# Altium PCB PCB1.PcbDoc
Units mil, origin at the board's own origin, x right, y up, seen from the top; angles counter-clockwise.
Board outline 3939 x 2849 mil, 2 copper layers (Top Layer, Bottom Layer); 123 components, 150 nets, 586 pads, 247 vias.
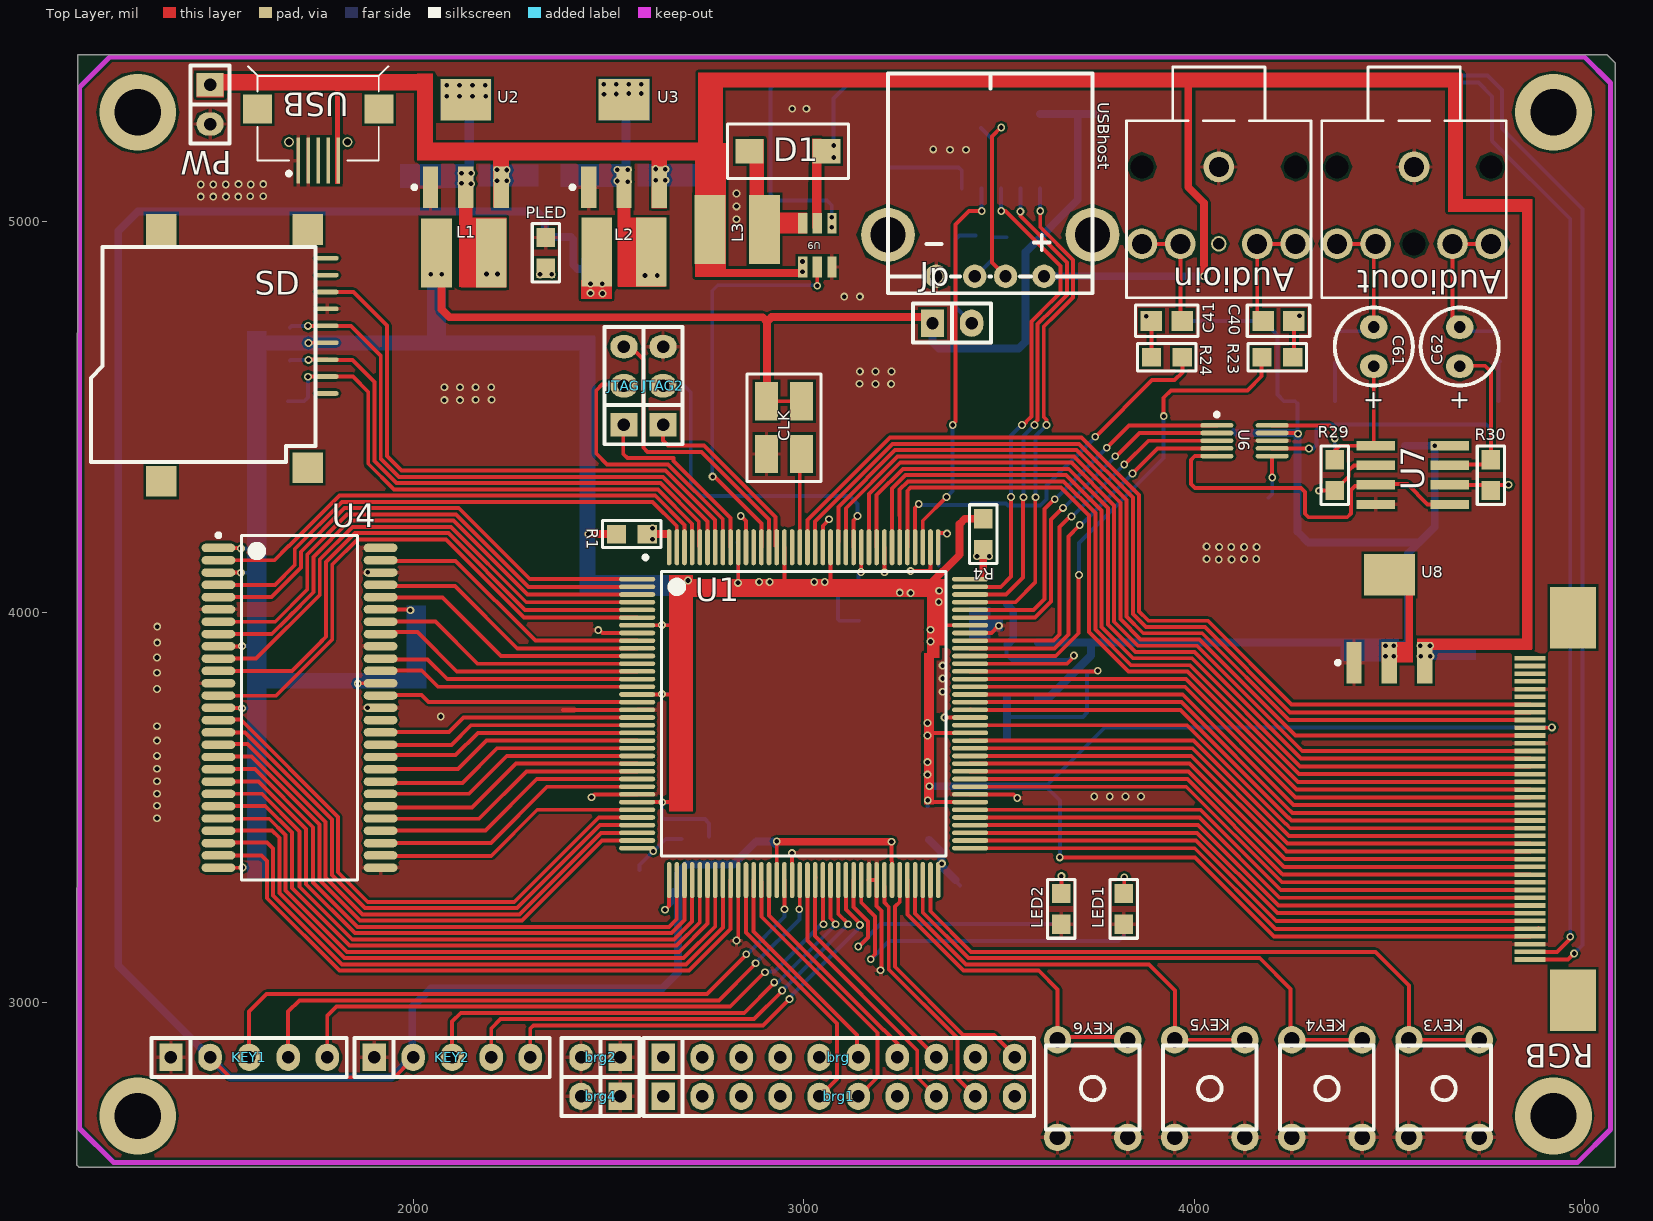
[diagram p0: Top Layer view]
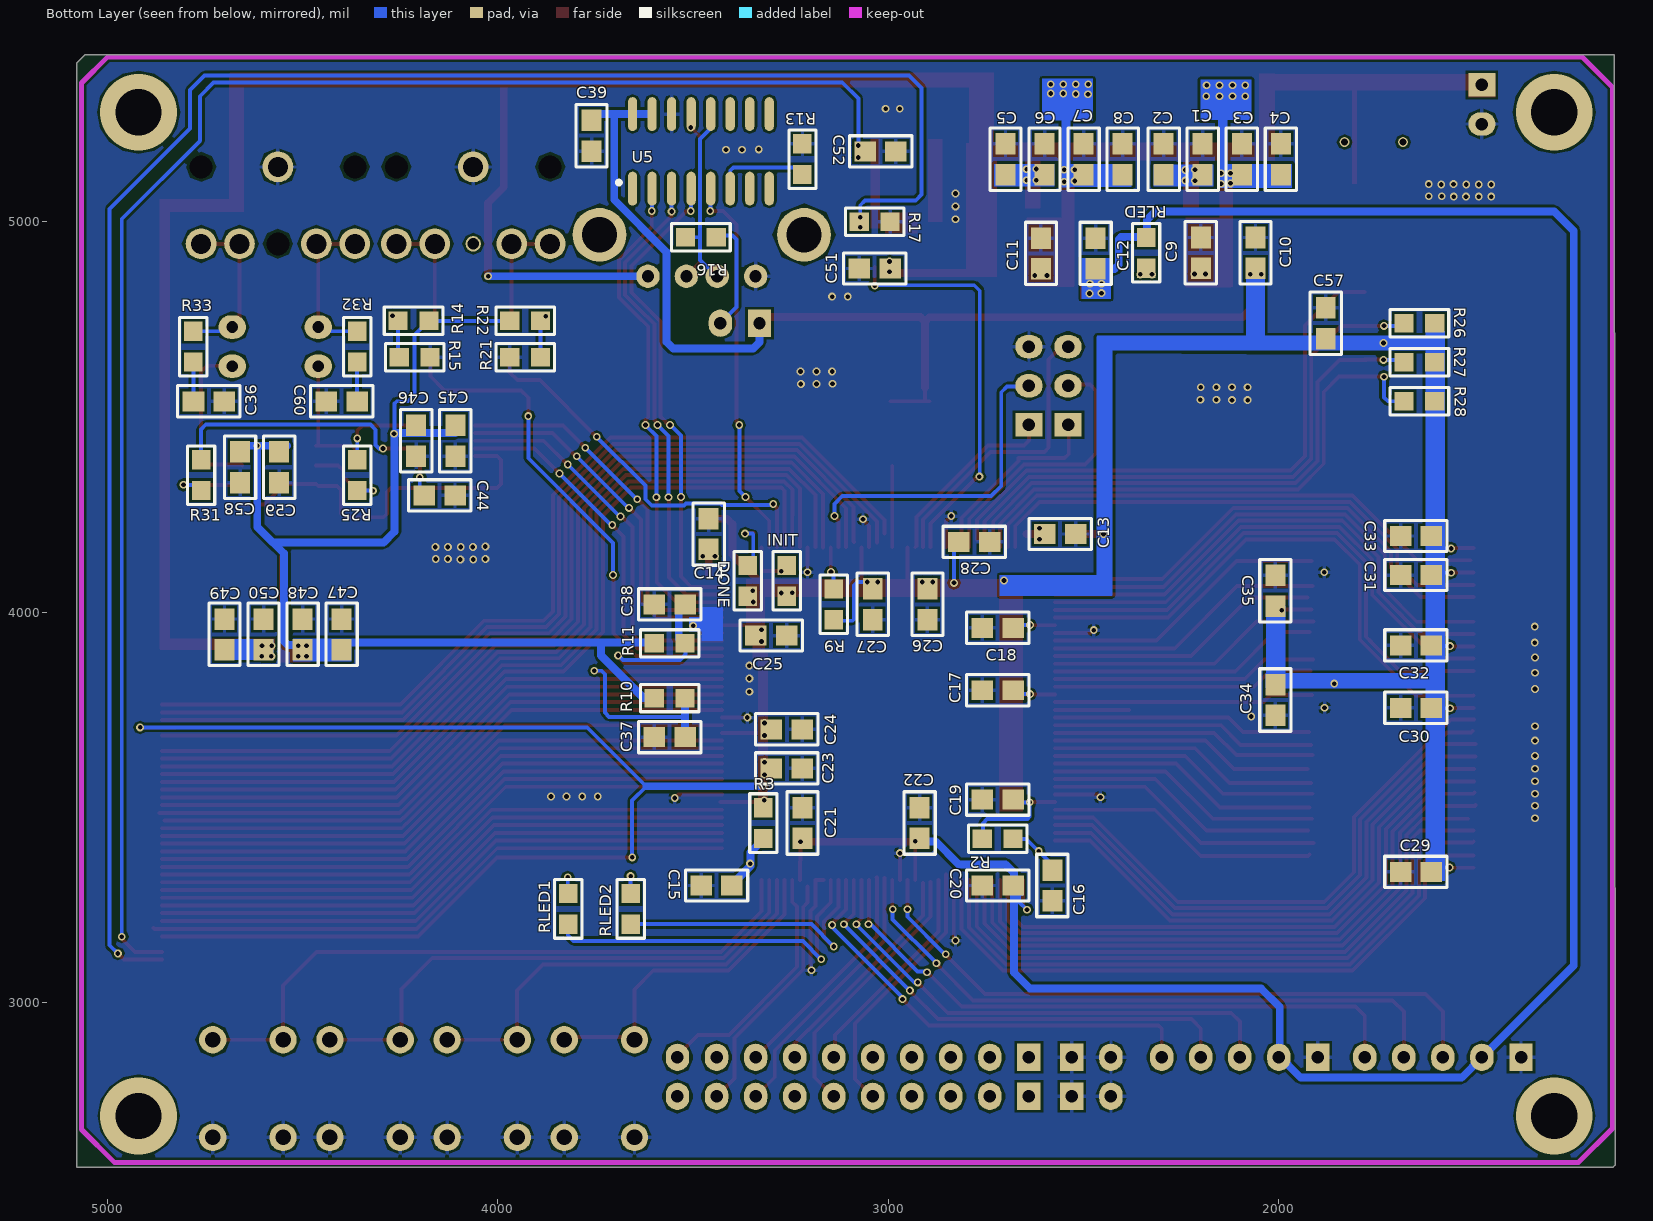
[diagram p1: Bottom Layer view, seen from below]

## Layer stack, top to bottom
Top Layer: signal copper 1.4
Dielectric: dielectric 12.6, FR-4, Dk 4.8
Bottom Layer: signal copper 1.4

## Board outline
1139,2584 1145,2578 5078,2578 5078,5407 5058,5427 1141,5427

## Design rules (kind name [scope] priority, off if disabled: settings)
Clearance [All] p1: gap=6
PolygonConnect [All] p1: connectstyle=Relief reliefconductorwidth=10 reliefentries=4 polygonreliefangle="90 Angle"
RoutingVias [All] p1: holewidth=28 width=50 viastyle="Through Hole" minholewidth=28 minwidth=50 maxholewidth=28 maxwidth=50
SilkscreenOverComponentPads [All] p1: minsilkscreentomaskgap=10
SolderMaskExpansion [All] p1: expansion=4
Width [All] p1: maxlimit=30 minlimit=10 preferedwidth=30
27 further rules are at their usual default settings.

## Components (designator, comment, footprint, x,y, rotation, side; value= is the part's Value field where it differs from the comment)
Audioin "Audio" AUDIO#1 4260,5140 r270 top
Audioout "Audio" AUDIO#2 4760,5140 r270 top
brg "CON10" sip10 2640,2860 r0 top
brg1 "CON10" sip10 2640,2760 r0 top
brg2 "CON2" SIP2 2480,2860 r180 top
brg4 "CON2" SIP2 2480,2760 r180 top
C1 "106" 电容器 2195,5160 r270 bottom
C2 "106" 电容器 2295,5160 r270 bottom
C3 "106" 电容器 2095,5160 r270 bottom
C4 "106" 电容器 1995,5160 r270 bottom
C5 "106" 电容器 2700,5160 r270 bottom
C6 "106" 电容器 2600,5160 r270 bottom
C7 "106" 电容器 2500,5160 r270 bottom
C8 "106" 电容器 2400,5160 r270 bottom
C9 "106" 电容器 2200,4920 r90 bottom
C10 "106" 电容器 2060,4920 r90 bottom
C11 "106" 电容器 2609.33,4918.5 r90 bottom
C12 "106" 电容器 2469.33,4918.5 r90 bottom
C13 "cpp" 电容器 2560,4200 r0 bottom
C14 "cpp" 电容器 3460,4200 r90 bottom
C15 "cpp" 电容器 3440,3300 r180 bottom
C16 "cpp" 电容器 2580,3300 r90 bottom
C17 "cpp" 电容器 2720,3800 r0 bottom
C18 "cpp" 电容器 2720,3960 r0 bottom
C19 "cpp" 电容器 2720,3520 r0 bottom
C20 "cpp" 电容器 2720,3300 r180 bottom
C21 "cpp" 电容器 3220,3460 r270 bottom
C22 "cpp" 电容器 2920,3460 r270 bottom
C23 "cpp" 电容器 3260,3600 r0 bottom
C24 "cpp" 电容器 3260,3700 r0 bottom
C25 "cpp" 电容器 3300,3940 r0 bottom
C26 "cpp" 电容器 2900,4020 r270 bottom
C27 "cpp" 电容器 3040,4020 r270 bottom
C28 "cpp" 电容器 2780,4180 r180 bottom
C29 "104" 电容器 1649,3335 r180 bottom
C30 "104" 电容器 1649,3755 r180 bottom
C31 "104" 电容器 1649,4095 r180 bottom
C32 "104" 电容器 1649,3915 r180 bottom
C33 "104" 电容器 1649,4195 r180 bottom
C34 "104" 电容器 2009,3775 r90 bottom
C35 "104" 电容器 2009,4055 r270 bottom
C36 "106" 电容器 4740,4540 r180 bottom
C37 "104" 电容器 3560,3680 r180 bottom
C38 "104" 电容器 3560,4020 r0 bottom
C39 "104" 电容器 3760,5220 r90 bottom
C40 "106" 电容器 4216,4746 r180 top
C41 "106" 电容器 3930,4746 r0 top
C44 "106" 电容器 4149,4299 r0 bottom
C45 "104" 电容器 4109,4439 r90 bottom
C46 "106" 电容器 4209,4439 r90 bottom
C47 "3.3uf" 电容器 4400,3943 r270 bottom
C48 "cpp" 电容器 4500,3943 r90 bottom
C49 "cpp" 电容器 4700,3943 r90 bottom
C50 "3.3uf" 电容器 4600,3943 r270 bottom
C51 "cpp" 电容器 3035,4880 r180 bottom
C52 "cpp" 电容器 3020,5180 r180 bottom
C57 "104" 电容器 1880,4740 r270 bottom
C58 "0.1uf" 电容器 4660,4371 r90 bottom
C59 "106" 电容器 4560,4371 r90 bottom
C60 "0.1uf" 电容器 4400,4540 r180 bottom
C61 "100uf" RB.1/.2 4460,4680 r270 top
C62 "Cap Pol" RB.1/.2 4680,4680 r270 top
CLK "SM77H" SM77H 3260,4480 r0 top
D1 "SS54" "SS54 - duplicate" 2960,5180 r180 top
DONE "" R_0805 3360,4080 r90 bottom
INIT "" R_0805 3260,4080 r270 bottom
Jp "CON2" SIP2 3380,4740 r0 top
JTAG "CON3" SIP3 2540,4580 r90 top
JTAG2 "CON3" SIP3 2640,4580 r90 top
KEY1 "CON5" SIP5 1380,2860 r0 top
KEY2 "CON5" SIP5 1900,2860 r0 top
KEY3 "KEY" AN66 4640,2780 r180 top
KEY4 "KEY" AN66 4340,2780 r180 top
KEY5 "KEY" AN66 4040,2780 r180 top
KEY6 "KEY" AN66 3740,2780 r180 top
L1 "4.8u" L 2200,4920 r90 top
L2 "4.8u" L 2610,4922 r90 top
L3 "L" L 2900,4980 r90 top
LED1 "R_0805" R_0805 3820,3240 r90 top
LED2 "R_0805" R_0805 3660,3240 r90 top
PLED "5K" R_0805 2340,4920 r90 top
PW "CON2" SIP2 1480,5300 r270 top
R1 "R_0805" R_0805 2560,4200 r180 top
R2 "R_0805" R_0805 2720,3420 r180 bottom
R3 "R_0805" R_0805 3320,3460 r270 bottom
R4 "R_0805" R_0805 3460,4200 r90 top
R9 "10K" R_0805 3140,4020 r270 bottom
R10 "10K" R_0805 3560,3780 r0 bottom
R11 "10K" R_0805 3560,3920 r180 bottom
R13 "10K" R_0805 3220,5160 r270 bottom
R14 "10K" R_0805 4216,4746 r180 bottom
R15 "10K" R_0805 4213,4653 r0 bottom
R16 "10K" R_0805 3480,4960 r0 bottom
R17 "10K" R_0805 3035,5000 r0 bottom
R21 "10K" R_0805 3930,4653 r180 bottom
R22 "10K" R_0805 3930,4746 r0 bottom
R23 "R_0805" R_0805 4213,4653 r0 top
R24 "R_0805" R_0805 3930,4653 r180 top
R25 "R_0805" R_0805 4360,4351 r270 bottom
R26 "10k" R_0805 1640,4740 r180 bottom
R27 "10k" R_0805 1640,4640 r180 bottom
R28 "10k" R_0805 1640,4540 r180 bottom
R29 "R_0805" R_0805 4360,4351 r90 top
R30 "R_0805" R_0805 4760,4351 r90 top
R31 "R_0805" R_0805 4760,4351 r270 bottom
R32 "R_0805" R_0805 4360,4680 r90 bottom
R33 "R_0805" R_0805 4780,4680 r270 bottom
RGB "PFC_40PIN" FPC_40PIN 4860,3500 r180 top
RLED "5K" R_0805 2340,4920 r90 bottom
RLED1 "R_0805" R_0805 3820,3240 r270 bottom
RLED2 "R_0805" R_0805 3660,3240 r270 bottom
SD "SD" TF卡座 1780,4560 r270 top
U1 "EF2" LQFP_EF2 3000,3740 r0 top
U2 "1117_3.3" SOT230P700X180-4N 2135,5200 r90 top
U3 "1117_2.5" SOT230P700X180-4N 2540,5200 r90 top
U4 "SDRAM" SDRAM 1709,3755 r0 top
U5 "WCH554" WCH554G 3480,5180 r90 bottom
U6 "CS4344" "SSOP10 _CS4344" 4129,4439 r0 top
U7 "TDA1308" TDA1308 4560,4351 r0 top
U8 "1117_3.3" SOT230P700X180-4N 4500,3983 r90 top
U9 "SY7200" SOT23-6N 3035,4940 r90 top
USB "USB" micro-USB 1740,5280 r90 top
USBhost "USBhost" USB-H 3340,4860 r180 top

## Footprints (in the part's own frame and the unit in brackets; to place one, negate y for a bottom-side part, rotate by r counter-clockwise, add the part's x,y. Pads: shape width x height; smd on the part's side, far side on the other; paste and mask are expansions set on the pad)
AN66 [mil]
  round 70 hole 40: 1(-90,125) 1(90,125) 2(-90,-125) 2(90,-125)
  silkscreen extent -120,-110 120,105
AUDIO#1 [mm]
  round 1 hole 0.762: 0(5,-5)
  round 1 hole 1.5: 1(0,0) 2(0,-10)
  round 2 hole 1.3: 1S(0,-5) 2R(5,-10) 3N(5,-7.5) 4N(5,-2.5) 5T(5,0)
  silkscreen extent -6.5,-11 8.5,1, body extent -6.23,-11.05 8.77,1.15, height 11
AUDIO#2 [mm]
  round 1 hole 1.5: 0(5,-5) 1(0,0) 2(0,-10)
  round 2 hole 1.3: 1S(0,-5) 2R(5,-10) 3N(5,-7.5) 4N(5,-2.5) 5T(5,0)
  silkscreen extent -6.5,-11 8.5,1, body extent -6.23,-11.05 8.77,1.15, height 11
FPC_40PIN [mm]
  rect 3x4 smd: 0(-2.8,-12.35) 0(-2.8,12.55)
  rect 2x0.3 smd: 1(0,-9.702) 2(0,-9.199) 3(0,-8.697) 4(0,-8.194) 5(0,-7.692) 6(0,-7.189) 7(0,-6.687) 8(0,-6.185) 9(0,-5.683) 10(0,-5.18) 11(0,-4.677) 12(0,-4.175) 13(0,-3.672) 14(0,-3.169) 15(0,-2.666) 16(0,-2.164) 17(0,-1.661) 18(0,-1.158) 19(0,-0.655) 20(0,-0.153) 21(0,0.349) 22(0,0.852) 23(0,1.354) 24(0,1.855) 25(0,2.357) 26(0,2.86) 27(0,3.363) 28(0,3.866) 29(0,4.369) 30(0,4.871) 31(0,5.374) 32(0,5.877) 33(0,6.38) 34(0,6.881) 35(0,7.384) 36(0,7.887) 37(0,8.387) 38(0,8.89) 39(0,9.392) 40(0,9.895)
L [mm]
  rect 4.5x2 smd: 1(0,3.556) 2(0,0)
LQFP_EF2 [mm]
  oval 2.35x0.3 smd: 1(-10.825,8.75) 2(-10.825,8.25) 3(-10.825,7.75) 4(-10.825,7.25) 5(-10.825,6.75) 6(-10.825,6.25) 7(-10.825,5.75) 8(-10.825,5.25) 9(-10.825,4.75) 10(-10.825,4.25) 11(-10.825,3.75) 12(-10.825,3.25) 13(-10.825,2.75) 14(-10.825,2.25) 15(-10.825,1.75) 16(-10.825,1.25) 17(-10.825,0.75) 18(-10.825,0.25) 19(-10.825,-0.25) 20(-10.825,-0.75) 21(-10.825,-1.25) 22(-10.825,-1.75) 23(-10.825,-2.25) 24(-10.825,-2.75) 25(-10.825,-3.25) 26(-10.825,-3.75) 27(-10.825,-4.25) 28(-10.825,-4.75) 29(-10.825,-5.25) 30(-10.825,-5.75) 31(-10.825,-6.25) 32(-10.825,-6.75) 33(-10.825,-7.25) 34(-10.825,-7.75) 35(-10.825,-8.25) 36(-10.825,-8.75) 73(10.825,-8.75) 74(10.825,-8.25) 75(10.825,-7.75) 76(10.825,-7.25) 77(10.825,-6.75) 78(10.825,-6.25) 79(10.825,-5.75) 80(10.825,-5.25) 81(10.825,-4.75) 82(10.825,-4.25) 83(10.825,-3.75) 84(10.825,-3.25) 85(10.825,-2.75) 86(10.825,-2.25) 87(10.825,-1.75) 88(10.825,-1.25) 89(10.825,-0.75) 90(10.825,-0.25) 91(10.825,0.25) 92(10.825,0.75) 93(10.825,1.25) 94(10.825,1.75) 95(10.825,2.25) 96(10.825,2.75) 97(10.825,3.25) 98(10.825,3.75) 99(10.825,4.25) 100(10.825,4.75) 101(10.825,5.25) 102(10.825,5.75) 103(10.825,6.25) 104(10.825,6.75) 105(10.825,7.25) 106(10.825,7.75) 107(10.825,8.25) 108(10.825,8.75)
  oval 0.3x2.35 smd: 37(-8.75,-10.825) 38(-8.25,-10.825) 39(-7.75,-10.825) 40(-7.25,-10.825) 41(-6.75,-10.825) 42(-6.25,-10.825) 43(-5.75,-10.825) 44(-5.25,-10.825) 45(-4.75,-10.825) 46(-4.25,-10.825) 47(-3.75,-10.825) 48(-3.25,-10.825) 49(-2.75,-10.825) 50(-2.25,-10.825) 51(-1.75,-10.825) 52(-1.25,-10.825) 53(-0.75,-10.825) 54(-0.25,-10.825) 55(0.25,-10.825) 56(0.75,-10.825) 57(1.25,-10.825) 58(1.75,-10.825) 59(2.25,-10.825) 60(2.75,-10.825) 61(3.25,-10.825) 62(3.75,-10.825) 63(4.25,-10.825) 64(4.75,-10.825) 65(5.25,-10.825) 66(5.75,-10.825) 67(6.25,-10.825) 68(6.75,-10.825) 69(7.25,-10.825) 70(7.75,-10.825) 71(8.25,-10.825) 72(8.75,-10.825) 109(8.75,10.825) 110(8.25,10.825) 111(7.75,10.825) 112(7.25,10.825) 113(6.75,10.825) 114(6.25,10.825) 115(5.75,10.825) 116(5.25,10.825) 117(4.75,10.825) 118(4.25,10.825) 119(3.75,10.825) 120(3.25,10.825) 121(2.75,10.825) 122(2.25,10.825) 123(1.75,10.825) 124(1.25,10.825) 125(0.75,10.825) 126(0.25,10.825) 127(-0.25,10.825) 128(-0.75,10.825) 129(-1.25,10.825) 130(-1.75,10.825) 131(-2.25,10.825) 132(-2.75,10.825) 133(-3.25,10.825) 134(-3.75,10.825) 135(-4.25,10.825) 136(-4.75,10.825) 137(-5.25,10.825) 138(-5.75,10.825) 139(-6.25,10.825) 140(-6.75,10.825) 141(-7.25,10.825) 142(-7.75,10.825) 143(-8.25,10.825) 144(-8.75,10.825)
  silkscreen extent -10.41,-9.25 9.25,10.28, body extent -10.25,-10.25 10.25,10.25, height 1.6
micro-USB [mm]
  rect 3x0.25 smd: 1(-3.146,-1.732) 2(-3.146,-1.082) 3(-3.146,-0.432) 4(-3.146,0.218) 5(-3.146,0.868)
  round 0.635 hole 0.457 unplated: MH1(-1.938,1.468) MH2(-1.938,-2.332)
  rect 1.9x1.9 smd: ""(0.212,3.518) ""(0.212,-4.382)
  silkscreen extent -4.11,-5 2.99,4.14, body extent -2.67,-4.83 2.93,3.97, height 2.74
R_0805 [mm]
  rect 1.25x1.2 smd: 1(-1,0) 2(1,0)
  silkscreen extent -1.91,-0.89 1.91,0.89
RB.1/.2 [mil]
  oval 60x70 hole 30: 1(50,0) 2(-50,0)
  silkscreen extent -100,-100 100,100
SDRAM [mm]
  oval 2.2x0.55 smd: 1(-5.275,10.4) 2(-5.275,9.6) 3(-5.275,8.8) 4(-5.275,8) 5(-5.275,7.2) 6(-5.275,6.4) 7(-5.275,5.6) 8(-5.275,4.8) 9(-5.275,4) 10(-5.275,3.2) 11(-5.275,2.4) 12(-5.275,1.6) 13(-5.275,0.8) 14(-5.275,0) 15(-5.275,-0.8) 16(-5.275,-1.6) 17(-5.275,-2.4) 18(-5.275,-3.2) 19(-5.275,-4) 20(-5.275,-4.8) 21(-5.275,-5.6) 22(-5.275,-6.4) 23(-5.275,-7.2) 24(-5.275,-8) 25(-5.275,-8.8) 26(-5.275,-9.6) 27(-5.275,-10.4) 28(5.275,-10.4) 29(5.275,-9.6) 30(5.275,-8.8) 31(5.275,-8) 32(5.275,-7.2) 33(5.275,-6.4) 34(5.275,-5.6) 35(5.275,-4.8) 36(5.275,-4) 37(5.275,-3.2) 38(5.275,-2.4) 39(5.275,-1.6) 40(5.275,-0.8) 41(5.275,0) 42(5.275,0.8) 43(5.275,1.6) 44(5.275,2.4) 45(5.275,3.2) 46(5.275,4) 47(5.275,4.8) 48(5.275,5.6) 49(5.275,6.4) 50(5.275,7.2) 51(5.275,8) 52(5.275,8.8) 53(5.275,9.6) 54(5.275,10.4)
  silkscreen extent -5.4,-11.2 3.77,11.35, body extent -5.15,-11.18 5.14,11.17, height 1.75
SIP2 [mil]
  rect 60x70 hole 32: 1(-50,0)
  oval 60x70 hole 32: 2(50,0)
  silkscreen extent -100,-50 100,50
SIP3 [mil]
  rect 60x70 hole 32: 1(-100,0)
  oval 60x70 hole 32: 2(0,0) 3(100,0)
  silkscreen extent -150,-50 150,50
SIP5 [mil]
  rect 60x70 hole 32: 1(0,0)
  oval 60x70 hole 32: 2(100,0) 3(200,0) 4(300,0) 5(400,0)
  silkscreen extent -50,-50 450,50
sip10 [mil]
  rect 60x70 hole 32: 1(0,0)
  oval 60x70 hole 32: 2(100,0) 3(200,0) 4(300,0) 5(400,0) 6(500,0) 7(600,0) 8(700,0) 9(800,0) 10(900,0)
  silkscreen extent -50,-50 950,50
SM77H [mm]
  rect 1.5x2.5 smd: 1(-9.017,1.524) 2(-9.017,-1.905) 3(-6.731,-1.905) 4(-6.731,1.524)
  silkscreen extent -10.29,-3.68 -5.46,3.3
SOT23-6N [mm]
  rect 1.35x0.6 smd: 1(-1.425,0.95) 2(-1.425,0) 3(-1.425,-0.95) 4(1.425,-0.95) 5(1.425,0) 6(1.425,0.95)
  body extent -0.51,-1.4 0.51,1.4, height 1.1
SOT230P700X180-4N [mm] "SOT223, 4-Leads, Body 6.7x7.3mm (max), Pitch 2.30mm, IPC Medium Density"
  rect 2.7x1 smd: 1(-2.85,2.3) 2(-2.85,0) 3(-2.85,-2.3)
  rect 2.7x3.3 smd: 2(2.85,0)
  silkscreen extent -2.97,3.22 -2.73,3.47, body extent -1.85,-3.35 1.85,3.35, height 1.8
"SS54 - duplicate" [mm]
  rect 1.8x1.6 smd: 1(-2.5,0) 2(2.5,0)
  silkscreen extent -3.94,-1.78 3.94,1.78
"SSOP10 _CS4344" [mm]
  oval 2.15x0.3 smd: 1(-1.8,1) 2(-1.8,0.5) 3(-1.8,0) 4(-1.8,-0.5) 5(-1.8,-1) 6(1.8,-1) 7(1.8,-0.5) 8(1.8,0) 9(1.8,0.5) 10(1.8,1)
  silkscreen extent -1.92,1.58 -1.67,1.82, body extent -1.5,-1.5 1.5,1.5, height 1.75
TDA1308 [mm] "SOIC, 8-Leads, Body 5.0x4.0mm (max), Pitch 1.27mm, IPC Medium Density"
  rect 2.5x0.6 smd: 1(-2.4,1.905) 2(-2.4,0.635) 3(-2.4,-0.635) 4(-2.4,-1.905) 5(2.4,-1.905) 6(2.4,-0.635) 7(2.4,0.635) 8(2.4,1.905)
  body extent -2,-2.5 2,2.5, height 1.75
TF卡座 [mm]
  rect 2x2 smd: 0(-10.668,-1.27) 0(-10.668,-10.795) 0(4.826,-1.27) 0(5.715,-10.795)
  oval 0.3x1.5 smd: 1(0,0) 2(-1.1,0) 3(-2.2,0) 4(-3.3,0) 5(-4.4,0) 6(-5.5,0) 7(-6.6,0) 8(-7.7,0) 9(-8.8,0)
  silkscreen extent -9.52,-15.37 4.45,-0.76, body extent -10.79,-15.24 5.72,0.13, height 2
USB-H [mm]
  round 1.524 hole 0.8: 1(0,0) 2(-2.5,0) 3(-4.5,0) 4(-7,0)
  round 3.5 hole 2.3: 5(-10.15,-2.7) 5(3.15,-2.7)
  silkscreen extent -10.15,-13.2 3.15,1.1, body extent -11.4,-13.06 4.4,1.1, height 7.55
WCH554G [mm]
  oval 2.2x0.6 smd: 1(-2.425,4.445) 2(-2.425,3.175) 3(-2.425,1.905) 4(-2.425,0.635) 5(-2.425,-0.635) 6(-2.425,-1.905) 7(-2.425,-3.175) 8(-2.425,-4.445) 9(2.425,-4.445) 10(2.425,-3.175) 11(2.425,-1.905) 12(2.425,-0.635) 13(2.425,0.635) 14(2.425,1.905) 15(2.425,3.175) 16(2.425,4.445)
  silkscreen extent -2.15,5.21 -1.91,5.46
电容器 [mm]
  rect 1.4x1.3 smd: 1(-1,0) 2(1,0)
  silkscreen extent -2.03,-1.02 2.03,1.02

## Part data
C1 C2 C3 C4 C5 C6 C7 C8 C9 C10 C11 C12 C29 C30 C31 C32 C33 C34 C35 C36 C37 C38 C39 C40 C41 C44 C45 C46 C47 C50 C57 C58 C59 C60: library part cpp
C61: library part "Cap Pol"
DONE INIT PLED R9 R10 R11 R13 R14 R15 R16 R17 R21 R22 R26 R27 R28 RLED: library part R_0805
L1 L2: library part L
SD: library part TF卡座
U2 U3 U8: library part 1117

## Via types
v1: diameter 20, hole 12, Top Layer to Bottom Layer, 243 vias
v2: diameter 196.85, hole 118.11, Top Layer to Bottom Layer, 4 vias

## Nets (pads, with @x,y where several pads share a name; then routed paths per layer and width w, separated by ;. In a path a pad name is that pad's centre, name@x,y a point inside that pad or via, vN(x,y) a via of type N, cw(c..) or ccw(c..) an arc to the next point about the centre after c; other vN are vias at no path point)
2.5V: C12.1 C20.2 C21.2 C22.2 KEY1.2 KEY2.2 L2.1 RLED.2 U1.37 U1.51 U1.66 | length 6755.7
  Top Layer w10: KEY1.2 1531,2809 1952,2809 KEY2.2@1995,2852 ; v1@2646,3238 2655.51,3247.51 U1.37 ; U1.51 v1@2931.1,3406 ; U1.66 3225.38,3412 v1@3226.38,3408
  Top Layer w20: v1@2932,3412 v1@3225.38,3412
  Bottom Layer w10: C12.1@2465,4879.13 C12.1 ; v1(2645,3238) 2665,3258 C20.2@2665,3284.37 ; C20.2@2659,3278.37 C20.2@2665,3284.37 ; C20.2@2665,3288 C20.2@2665,3284.37 ; C20.2 C20.2@2665,3284.37 ; C22.2@2929,3405 C22.2@2932,3409
  Bottom Layer w20: KEY1.2@1478,2862 KEY1.2 ; C12.1@2465,4879 2421,4879 2410,4890 2410,4955 2404,4961 2338,4961 2338,5004 2316,5026 1295,5026 1245,4976 1245,3095 KEY1.2 ; C22.2@2929,3405 2921,3413 2879,3413 2820,3354 2700,3354 2678,3332 2678,3077 2637,3036 2045,3036 1998,2989 1998,2878 2006,2870 1944,2808 1532,2808 KEY1.2
  other v1: 3225,3412 2931,3413 2485,4816 2454,4817 2454,4841 2484,4841
2.5VOUT: C7.2 C8.2 C11.1 L2.2 U3.2
  other v1: 2594,4862 2625,4862 2550,5102 2523,5104 2523,5133 2550,5133 2489,5326 2520,5327 2552,5328 2584,5328 2488,5352 2520,5352 2552,5352 2584,5352
3.3V: C10.1 C17.1 C18.1 C19.1 C23.2 C24.2 C25.2 C26.1 C27.1 C28.1 C29.2 C30.2 C31.2 C32.2 C33.2 C34.2 C35.2 C39.2 C57.2 CLK.1 CLK.4 DONE.1 INIT.2 Jp.1 L1.1 R1.2 R2.1 R3.1 R4.2 R9.2 R26.2 R27.2 R28.2 RGB.10 RGB.37 SD.4 U1.7 U1.16 U1.30 U1.79 U1.88 U1.102 U1.123 U1.129 U1.135 U4.1 U4.3 U4.9 U4.14 U4.27 U4.43 U4.49 U5.15 U5.16 | length 8567.3
  Top Layer w10: U4.27 v1@1561.55,3345.55 ; U4.14 v1@1561,3755 ; U4.9 v1@1561.48,3912.48 ; U4.3 v1@1558.54,4101.46 ; U4.1 v1@1557.55,4164.45 ; v1@1734.92,4689.92 SD.4 ; v1@1860.99,3817.99 U4.43 ; U4.49 1994.03,4006.97 v1@1995,4006 ; v1@2448,4199 v1(2449,4200) ; U1.30 2685.38,3513.62 ; U1.16 2678.79,3789.21 ; U1.7 2680.38,3966.38 ; v1@2832.68,4074 U1.135 ; CLK.1@2895,4540 CLK.1 CLK.4 ; CLK.1@2906,4545 CLK.1@2906,4575 ; 2906,4742 2907,4743 ; 2950,4076 2950.79,4076.79 U1.129 ; U1.123 3068.9,4080.1 3070,4079 ; Jp.1@3312,4758 Jp.1 ; v1@3314,3514 U1.79@3430,3514 ; v1@3316,3692 3317.21,3690.79 U1.88 ; 3346.62,3966.38 U1.102 ; R4.2@3460,4227 R4.2 ; v1@3654.02,3372 v1(3656,3372) 4002.37,3372 4204.57,3169.8 RGB.37 ; RGB.10@4826,3703.94 RGB.10 v1@4918,3703.94
  Top Layer w20: v1(2073,4865) 2073,4775 2093,4755 2895,4755 2906,4744 ; v1(2449,4200) R1.2 ; CLK.1@2906,4575 2906,4742 2906,4744 ; 3318,4066 3399.37,4147.37 3399.37,4225.37 3413,4239 R4.2@3463,4239 ; Jp.1@3322,4758 3312,4758 3310,4756 2918,4756 2906,4744
  Bottom Layer w10: v1(1559,4101) C31.2@1599,4101 ; v1(1559,4163) 1600,4163 ; v1(1562,3754) 1600,3754 C30.2@1602,3752 ; v1(1562,3913) C32.2@1601,3913 ; v1(1563,3346) 1607,3346 C29.2@1608,3347 ; C31.2@1603.63,4101 C31.2 ; v1(2637,3790) C17.1@2680.63,3790 ; v1(2637,3967) C18.1@2678,3967 ; C19.1@2678,3513 v1(2638,3513) 2638,3476 2644,3470 2747,3470 2758,3459 R2.1@2758,3425 ; C28.1@2831,4178 2832,4177 v1(2832,4075) ; v1(3054,4077) 3079,4077 3088,4068 3088,3982 3092,3978 R9.2@3142,3978 ; R3.1@3317,3504 R3.1@3318,3503 ; v1@3656,3373 3656,3518 3620,3554 3771,3705 v1(4916,3705)
  Bottom Layer w20: v1(3322,3554) 3620,3554 ; Jp.1 3330,4691 3346,4675 3551,4675 3568,4692 3568,4922 3702,5056 3702,5273 ; U5.15 U5.16 3770.53,5275.47 C39.2@3774,5272
  other v1: 3318,3518 3317,3584 3317,3616 3317,3684 3317,3716 1858,3817 3325,3925 3325,3955 1993,4005 3346,4026 3274,4049 3246,4050 3347,4055 2886,4077 2913,4077 3027,4077 2704,4081 1732,4689 2045,4865
3.3VA: C45.2 C46.2 C47.2 C48.1 C58.2 C59.2 R10.2 R11.1 R14.2 R22.2 U6.9 U7.8 U8.2 | length 3063.4
  Top Layer w10: U6.9 v1@4263,4459
  Bottom Layer w10: R22.2 R14.2 4177,4746 4213,4710 4213,4557 4230,4540 4259,4540 4265,4534 4265,4460 4270,4455 v1@4268,4453 ; C45.2@4101,4467 C45.2@4109,4459 ; v1@4265,4453 v1@4267,4455
  Bottom Layer w20: R10.2@3599.37,3777.63 R10.2@3600,3777 ; R10.2 3627,3780 3736,3889 3736,3918 ; R11.1@3599.37,3922 4234,3922 4285,3922 4390.63,3922 C47.2@4399.63,3913 ; C45.2@4109,4459 v1@4264,4459 ; v1@4265,4453 4265,4206 4293,4178 4575,4178 ; C48.1@4510,3916 4538,3916 4548,3926 4548,4151 4575,4178 ; C59.2@4540,4426 v1(4616,4426) ; C58.2@4659,4426 v1(4616,4426) ; 4575,4178 4576,4178 4616,4218 v1(4616,4426)
  other v1: 4490,3887 4511,3887 4490,3914 4511,3914 4266,4457
3.3VOUT: C3.2 C4.2 C9.1 L1.2 U2.2
  other v1: 2188,4866 2216,4866 2148,5097 2124,5098 2124,5124 2148,5124 2086,5321 2119,5321 2152,5321 2186,5321 2086,5349 2119,5349 2152,5349 2185,5349
5V: C1.2 C2.2 C5.2 C6.2 C49.1 C50.2 C51.2 L3.1 PW.1 U2.3 U3.3 U8.3 U9.1 USB.1 USBhost.4 | length 928
  Top Layer w20: 3985,5362 3985,5088 4025,5048 v1(4025,4860)
  Bottom Layer w20: USBhost.4 v1(4025,4860)
  other v1: 4580,3887 4605,3887 4579,3914 4604,3914 2997,4872 2997,4898 2215,5105 2240,5105 2621,5106 2646,5106 2240,5132 2215,5133 2646,5134 2621,5135
A0: U1.42 U4.23 | length 1602
  Top Layer w10: U4.23@1516,3471 1631.63,3471 1673.69,3428.94 1673.69,3287.2 1830.88,3130 2681.51,3130 2754,3202.49 U1.42@2754,3312.14
A1: U1.43 U4.24 | length 1643.3
  Top Layer w10: U4.24@1501,3441 1639,3441 1657.69,3422.31 1657.69,3280.57 1824.25,3114 2692.37,3114 2773.62,3195.25 U1.43
A2: U1.44 U4.25 | length 1653.9
  Top Layer w10: U4.25@1501,3413 1504,3410 1626,3410 1641.69,3394.31 1641.69,3273.94 1817.63,3098 2699,3098 2793.31,3192.31 U1.44
A3: U1.45 U4.26 | length 1658.9
  Top Layer w10: U4.26 1611.28,3377.05 1625.69,3362.64 1625.69,3267.31 1811,3082 2706,3082 2812.99,3188.99 U1.45
A4: U1.31 U4.29 | length 701.9
  Top Layer w10: U4.29@1922,3379 1925,3376 2200,3376 2317.94,3493.94 U1.31
A5: U1.28 U4.30 | length 722.5
  Top Layer w10: U4.30@1911,3409 2199,3409 2342.99,3552.99 U1.28
A6: U1.27 U4.31 | length 703.4
  Top Layer w10: U4.31@1925,3441 2185,3441 2316.68,3572.68 U1.27
A7: U1.26 U4.32 | length 709.1
  Top Layer w10: U4.32@1915,3471 2169,3471 2290.36,3592.36 U1.26
A8: U1.25 U4.33 | length 698.2
  Top Layer w10: U4.33@1922,3500 2151,3500 2263.05,3612.05 U1.25
A9: U1.24 U4.34 | length 699.9
  Top Layer w10: U4.34@1914,3535 2143,3535 2239.73,3631.73 U1.24
A10: U1.41 U4.22 | length 1603.4
  Top Layer w10: U4.22@1496,3506 1498,3504 1621.25,3504 1689.69,3435.57 1689.69,3293.82 1837.51,3146 2674.88,3146 2734,3205.12 2734,3313.57 U1.41
A11: U1.23 U4.35 | length 692.4
  Top Layer w10: U4.35@1918,3563 2126,3563 2214.42,3651.42 U1.23
A12: U1.22 U4.36 | length 678.1
  Top Layer w10: U4.36@1926,3598 2115,3598 2188.1,3671.1 U1.22
ADC_L: R24.1 U1.112 | length 999.4
  Top Layer w10: U1.112 3285.43,4267.43 v1@3294,4276 ; v1(3747,4449) 3892,4594 3950,4594 3970,4614 R24.1@3970,4657
  Bottom Layer w10: v1(3295,4277) 3298,4274 3425.92,4274 3429.85,4277.93 3518.37,4277.93 3523.3,4273 3606,4273 3622,4289 3622,4324 v1(3747,4449) v1@3748,4450
ADC_R: R23.1 U1.98 | length 1309.7
  Top Layer w10: U1.98 3645.64,3887.64 3704,3946 3704,4091 v1@3709,4096 ; v1(3922,4502) 3922,4549 3941,4568 4137,4568 4173,4604 R23.1@4173,4649
  Bottom Layer w10: v1(3705,4095) 3705,4177 3922,4394 v1@3922,4495
BS0: U1.39 U4.20 | length 1560
  Top Layer w10: U4.20@1500,3566 1604.51,3566 1725.43,3445.08 1725.43,3303.33 1850.76,3178 2661.63,3178 2694.88,3211.25 2694.88,3245 ; 2694.88,3240 2694.88,3245 ; U1.39 2694.88,3245
BS1: U1.40 U4.21 | length 1579
  Top Layer w10: U4.21@1499,3538 1502,3535 1612.88,3535 1709.43,3438.45 1709.43,3296.71 1844.14,3162 2668.25,3162 2714.57,3208.31 U1.40
CAS: U1.34 U4.17 | length 1427
  Top Layer w10: U4.17@1497,3662 1576.39,3662 1776,3462.39 1776,3320.65 1870.65,3226 2272.25,3226 2481.14,3434.88 U1.34
CKE: U1.21 U4.37 | length 683.3
  Top Layer w10: U4.37@1914,3634 2109,3634 2165.79,3690.79 U1.21
CLK: U1.20 U4.38 | length 677.7
  Top Layer w10: U4.38@1917,3660 2098,3660 2148.47,3710.47 U1.20
CS: U1.38 U4.19 | length 1533.6
  Top Layer w10: U4.19@1500,3598 1595.14,3598 1744,3449.14 1744,3307.39 1857.39,3194 2655,3194 2675,3214 2675,3313.62 U1.38
DAC_LRCK: U1.100 U6.3 | length 1009.4
  Top Layer w10: U1.100 3639.75,3927.01 3655,3942.25 3655,4218 3682,4245 v1(3686,4245) v1@3687,4245 ; v1(3821,4378) 3822,4378 3883,4439 U6.3
  Bottom Layer w10: v1@3684,4243 3686,4243 v1(3821,4378)
DAC_MCLK: U1.99 U6.4 | length 980.8
  Top Layer w10: U1.99 3642.7,3907.32 3678,3942.63 3678,4194 v1@3704,4220 ; v1@3844,4358 3845,4358 3906.32,4419.31 U6.4
  Bottom Layer w10: v1@3710,4223 v1(3842,4355)
  other v1: 3707,4223
DAC_OUT1: R25.1 U6.10 | length 236.7
  Top Layer w10: U6.10 4346.63,4478.37 4360,4465 v1(4360,4445)
  Bottom Layer w10: R25.1@4360,4394 v1(4360,4445)
DAC_OUT2: R31.1 U6.7 | length 693.6
  Top Layer w10: U6.7 v1@4295,4419.31
  Bottom Layer w10: v1@4293,4418 4303,4418 4313,4428 4313,4467 4326,4480 4748,4480 4760,4468 R31.1@4760,4390
  other v1: 4294,4419
DAC_SCK: U1.103 U6.2 | length 950.9
  Top Layer w10: U1.103 3592.06,3986.06 3633,4027 3633,4237 v1@3663,4267 ; v1@3795.5,4397.5 3798.5,4397.5 3859.69,4458.69 U6.2
  Bottom Layer w10: v1@3666,4267 v1(3798,4399)
  other v1: 3664,4267
DAC_SDIN: U1.104 U6.1 | length 963.3
  Top Layer w10: U1.104 3589.12,4005.75 3617,4033.63 3617,4264 v1@3641,4288 ; v1@3774,4419 3833.37,4478.37 ; 3834.37,4478.37 U6.1
  Bottom Layer w10: v1(3643,4289) 3645,4290 v1@3777,4422
  other v1: 3776,4421
DQ0: U1.142 U4.2 | length 1342.5
  Top Layer w10: U4.2@1509,4133 1645,4133 1681,4169 1682,4169 1811.28,4298.28 2619.96,4298.28 2694.88,4223.35 U1.142
DQ1: U1.143 U4.4 | length 1365.3
  Top Layer w10: U4.4 1645.96,4069.96 1697,4121 1697,4161.37 1817.9,4282.28 2613.33,4282.28 2675.2,4220.41 U1.143
DQ2: U1.1 U4.5 | length 1265.8
  Top Layer w10: U4.5 1637.09,4038.46 1713,4114.37 1713,4154.75 1824.53,4266.28 2116.86,4266.28 2298.65,4084.49 U1.1
DQ3: U1.2 U4.7 | length 1316.2
  Top Layer w10: U4.7 1646.85,3975.47 1729,4057.63 1729,4148.12 1831.16,4250.28 2110.23,4250.28 2295.71,4064.8 U1.2
DQ4: U1.3 U4.8 | length 1343.2
  Top Layer w10: U4.8 1637.98,3943.98 1678,3984 ; 1691.5,3997.5 1678,3984 ; U1.3 2292.76,4045.12 2103.61,4234.28 1837.79,4234.28 1745,4141.49 1745,4051 1678,3984
DQ5: U1.4 U4.10 | length 1345.1
  Top Layer w10: U4.10 1597.61,3880.98 1761,4044.37 1761,4134.86 1844.41,4218.28 2096.98,4218.28 2289.82,4025.43 U1.4
DQ6: U1.5 U4.11 | length 1422
  Top Layer w10: U4.11 1689.49,3849.49 1760,3920 ; 1767,3927 1760,3920 ; U1.5 2286.88,4005.75 2090.35,4202.28 1851.04,4202.28 1777,4128.24 1777,3937 1760,3920
DQ7: U1.6 U4.13 | length 1433.7
  Top Layer w10: U4.13 1501.82,3786 1649,3786 1793,3930 1793,4121.61 1857.67,4186.28 2083.72,4186.28 2283.94,3986.06 U1.6
DQ8: U1.17 U4.42 | length 666.5
  Top Layer w10: U4.42@1915,3788 2021,3788 2039.47,3769.53 U1.17
DQ9: U1.15 U4.44 | length 672.3
  Top Layer w10: U4.44@1919,3851 2022,3851 2064.1,3808.9 U1.15
DQ10: U1.14 U4.45 | length 682.7
  Top Layer w10: U4.45@1912,3879 2037,3879 2087.42,3828.58 U1.14
DQ11: U1.13 U4.47 | length 694.5
  Top Layer w10: U4.47@1921,3949 2011,3949 2111.73,3848.27 U1.13
DQ12: U1.12 U4.48 | length 707.6
  Top Layer w10: U4.48@1911,3976 2057,3976 2165.05,3867.95 U1.12
DQ13: U1.11 U4.50 | length 710.1
  Top Layer w10: U4.50@1926,4038 2075,4038 2225.36,3887.64 U1.11
DQ14: U1.10 U4.51 | length 726
  Top Layer w10: U4.51@1914,4067 2107,4067 2266.68,3907.32 U1.10
DQ15: U1.9 U4.53 | length 742.3
  Top Layer w10: U4.53@1916,4131 2109,4131 2312.99,3927.01 U1.9
GND: Audioin.1S Audioout.1S brg2.1 brg2.2 brg4.1 brg4.2 C1.1 C2.1 C3.1 C4.1 C5.1 C6.1 C7.1 C8.1 C9.2 C10.2 C11.2 C12.2 C13.1 C14.2 C15.1 C16.1 C17.2 C18.2 C19.2 C20.1 C21.1 C22.1 C23.1 C24.1 C25.1 C26.2 C27.2 C28.2 C29.1 C30.1 C31.1 C32.1 C33.1 C34.1 C35.1 C36.2 C37.1 C38.2 C39.1 C44.1 C45.1 C46.1 C47.1 C48.2 C49.2 C50.1 C51.1 C52.2 C57.1 C58.1 C59.1 C60.1 CLK.2 JTAG2.3 KEY1.1 KEY2.1 KEY3.1 KEY4.1 KEY5.1 KEY6.1 LED1.1 LED2.1 PLED.2 PW.2 R13.1 R15.1 R17.1 R21.1 RGB.5 RGB.12 RGB.38 SD.6 U1.8 U1.18 U1.29 U1.46 U1.53 U1.63 U1.64 U1.80 U1.90 U1.101 U1.116 U1.124 U1.134 U2.1 U3.1 U4.6 U4.12 U4.28 U4.41 U4.46 U4.52 U4.54 U5.14 U6.8 U7.4 U8.1 U9.3 USB.4 USB.5 USBhost.1 | length 1424.8
  Top Layer w10: 2383.84,3749.84 U1.18 ; v1@2454,3523 2464.31,3533.31 U1.29 ; v1@2475,3957 2485.31,3946.69 U1.8 ; v1@2829,3160 2832.68,3163.68 U1.46 ; v1@2839,4247 2852.36,4233.64 U1.134 ; v1@2970,3384 2970.47,3383.53 U1.53 ; U1.124 3049.21,4221.21 v1@3065,4237 ; U1.63@3166,3314 3166.18,3313.82 U1.63 U1.64 3187,3247 3199,3235 3199,3089 v1@3196,3086 ; U1.116 3206.69,4101.31 v1@3208,4100 ; v1@3358.16,3730.16 U1.90 ; U1.80 3537.69,3533.31 v1@3548,3523 ; U1.101 3480.69,3946.69 v1@3499.5,3965.5
  Bottom Layer w10: R21.1@3968,4668 R21.1@3983,4653
  other v1: 3197,3083 2828,3159 2970,3383 1344,3472 1344,3504 3547,3524 2457,3526 3744,3528 3784,3528 3824,3528 3864,3528 1344,3535 1344,3567 1344,3599 1344,3632 1344,3671 1344,3708 3361,3730 2071,3733 1883,3755 3356,3796 1344,3803 3356,3830 1344,3845 3356,3863 1344,3884 1345,3922 2474,3954 1345,3963 3500,3965 1884,4102 3207,4102 4063,4135 4096,4135 4032,4136 4128,4136 4159,4136 4064,4167 4095,4167 4128,4167 4160,4167 4032,4168 3065,4238 2839,4246 2080,4543 2120,4543 2160,4544 2201,4544 2080,4576 2120,4576 2160,4576 2200,4576 3184,4584 3224,4584 3143,4585 3144,4616 3184,4616 3225,4616 3104,4808 3144,4808 2828,5006 2828,5039 1456,5064 1488,5064 1521,5064 1552,5064 1583,5065 1616,5065 2828,5072 1456,5095 1488,5095 1520,5095 1584,5095 1553,5096 1616,5096 3375,5184 3416,5184 3332,5185 2971,5289 3007,5289
JTAG_EN: JTAG2.2 U1.120 | length 879.2
  Top Layer w10: U1.120 3127.95,4234.95 v1@3138,4245
  Bottom Layer w10: JTAG2.2@2638,4578 2696,4578 2711,4563 2711,4323 2737,4297 3118,4297 3138,4277 v1(3138,4246)
JTAG_TCK: JTAG.3 U1.131 | length 751.6
  Top Layer w10: JTAG.3@2547,4680 2557,4680 2590,4647 2590,4421 2600.69,4410.31 2659.82,4410.31 2659.94,4410.43 2738.57,4410.43 2911.42,4237.58 U1.131
JTAG_TDI: JTAG.1 U1.136 | length 492.9
  Top Layer w10: JTAG.1@2538,4476 2538,4405 2548.69,4394.31 2666.57,4394.31 ; 2666.57,4394.43 2666.57,4387.43 2813,4241 U1.136
JTAG_TDO: JTAG.2 U1.137 | length 705
  Top Layer w10: JTAG.2@2540,4583 2484,4583 2469,4568 2469,4406 2496.69,4378.31 2653.06,4378.31 2793,4238.37 2793,4166.49 U1.137
JTAG_TMS: JTAG2.1 U1.130 | length 490.5
  Top Layer w10: JTAG2.1@2640,4482 JTAG2.1 2640,4439.51 2653.2,4426.31 2653.31,4426.43 2745.2,4426.43 2928.32,4243.3 2928.32,4168.96 U1.130
KEY_C1: KEY1.5 U1.57 | length 1588.4
  Top Layer w10: KEY1.5 1780,2966 1804,2990 2812,2990 v1@2897.37,3075.37 ; U1.57 3049.21,3202.79 v1(3051,3201)
  Bottom Layer w10: v1@2897,3075 2902,3080 2925,3080 3046,3201 v1(3051,3201)
  other v1: 2901,3078
KEY_C2: KEY1.4 U1.54 | length 1614.1
  Top Layer w10: KEY1.4 1680,2977 1709,3006 2783,3006 2874,3097 v1@2874,3098 ; v1@2990.16,3240.16 U1.54
  Bottom Layer w10: v1@2881,3105 2989,3213 v1(2989,3239)
  other v1: 2877,3101
KEY_C3: KEY1.3 U1.52 | length 1684.6
  Top Layer w10: KEY1.3 1580,2977 1625,3022 2753,3022 v1@2855.5,3124.5 ; v1@2950.79,3236.21 U1.52
  Bottom Layer w10: v1@2856,3125 2951,3220 v1(2951,3239)
  other v1: 2853,3124
KEY_C4: KEY2.5 U1.60 | length 1166
  Top Layer w10: KEY2.5 2300,2934 2308,2942 2896,2942 2961,3007 2963,3007 v1@2963,3010 ; U1.60 3108.27,3238.73 v1@3146,3201
  Bottom Layer w10: v1@2962.5,3011.5 3143,3192 v1@3143,3204
  other v1: 2964,3009 3144,3199
KEY_C5: KEY2.4 U1.59 | length 1226.9
  Top Layer w10: KEY2.4 2200,2934 2224,2958 2873,2958 2943,3028 v1@2943,3032 ; U1.59 3088.58,3227.42 v1@3115,3201
  Bottom Layer w10: v1@2943,3029 v1@3115,3201
  other v1: 2945,3031 3114,3201
KEY_C6: KEY2.3 U1.58 | length 1301.3
  Top Layer w10: KEY2.3 2100,2952 2122,2974 2848,2974 v1@2925.5,3051.5 ; U1.58 3068.9,3216.1 v1@3084,3201
  Bottom Layer w10: v1@2923,3051 2933,3051 v1@3084,3202
  other v1: 2925,3052 3082,3201
KEY_C7: KEY3.2 U1.71 | length 1700.7
  Top Layer w10: U1.71 3324.8,3234.08 3428.88,3130 4464,3130 4550,3044 KEY3.2@4550,2908 ; KEY3.2@4550,2905 4730,2905 KEY3.2@4731,2905
KEY_C8: KEY4.2 U1.70 | length 1407.8
  Top Layer w10: U1.70 3305.12,3231.14 3422.25,3114 4168,3114 4247,3035 KEY4.2@4247,2913 ; KEY4.2@4250,2905 KEY4.2@4430,2905
KEY_C9: KEY5.2 U1.69 | length 1141.9
  Top Layer w10: U1.69 3285.43,3228.19 3415.63,3098 3884,3098 3951,3031 KEY5.2@3951,2905 ; KEY5.2@3950,2905 KEY5.2@3951,2905 ; KEY5.2@4133,2905 4130,2905 KEY5.2@3951,2905
KEY_C10: KEY6.2 U1.68 | length 861.8
  Top Layer w10: U1.68 3265.75,3225.25 3409,3082 3602,3082 3650,3034 3650,2912 3825,2912 KEY6.2@3834,2903
LCD_B0: RGB.20 U1.93 | length 1551.1
  Top Layer w10: U1.93 3970.79,3789.21 4253.98,3506.02 4254.74,3506.02 RGB.20
LCD_B1: RGB.19 U1.94 | length 1556
  Top Layer w10: U1.94 3569,3808.9 ; 3573.9,3808.9 3569,3808.9 ; RGB.19 4259.21,3525.79 3976.1,3808.9 3569,3808.9
LCD_B2: RGB.18 U1.95 | length 1551
  Top Layer w10: U1.95 3979.42,3828.58 4262.41,3545.59 RGB.18
LCD_B3: RGB.17 U1.113 | length 2229
  Top Layer w10: U1.113 3265.75,4310.75 3274,4319 3658.98,4319 3731,4246.98 3731,3948.98 3831.98,3848 3983,3848 4265.61,3565.39 RGB.17
LCD_B4: RGB.16 U1.114 | length 2266.6
  Top Layer w10: 3246,4248 3246,4313.63 3267.37,4335 3665.61,4335 3747,4253.61 3747,3955.61 3838.61,3864 3989.63,3864 4268.43,3585.2 4764,3585.2 ; U1.114 3246.06,4249.94 ; 4754.8,3585.2 4764,3585.2 ; RGB.16 4764,3585.2
LCD_B5: RGB.15 U1.115 | length 2288.9
  Top Layer w10: U1.115 3226.38,4316.63 3260.75,4351 3672.24,4351 3763,4260.24 3763,3962.24 3843.24,3882 3994.25,3882 4271.29,3604.96 4773,3604.96 ; 4766.04,3604.96 4773,3604.96 ; RGB.15 4773,3604.96
LCD_B6: RGB.14 U1.117 | length 2332.5
  Top Layer w10: U1.117 3187.01,4238.99 ; 3187,4223 3187,4299.88 3254.12,4367 3678.86,4367 3779,4266.86 3779,3968.86 3849.86,3898 4000.88,3898 4274.12,3624.76 RGB.14
LCD_B7: RGB.13 U1.118 | length 2343.3
  Top Layer w10: U1.118@3167,4166 3167,4302.51 3247.49,4383 3685.49,4383 3795,4273.49 3795,3975.49 3856.49,3914 4007.51,3914 4276.94,3644.57 RGB.13
LCD_CLK: RGB.11 U1.121 | length 2395.5
  Top Layer w10: 3108,4230 3108,4266.14 3240.86,4399 3692.12,4399 3811,4280.12 3811,3982.12 3863.12,3930 4014.14,3930 4260,3684.13 4760,3684.13 ; U1.121 3108.27,4239.73 ; 4751.87,3684.13 4760,3684.13 ; RGB.11 4760,3684.13
LCD_DE: RGB.7 U1.126 | length 2430.2
  Top Layer w10: U1.126@3010,4201 3010,4236.02 3220.98,4447 3712,4447 3859,4300 3859,4002 3883,3978 4035,3978 4249.73,3763.27 RGB.7
LCD_G0: RGB.28 U1.83 | length 1533.1
  Top Layer w10: U1.83 3985.66,3592.36 4229.01,3349.01 ; 4230.7,3347.32 4743.73,3347.32 4744.2,3347.8 RGB.28
LCD_G1: RGB.27 U1.84 | length 1535.1
  Top Layer w10: U1.84 3988.6,3612.05 4233.05,3367.6 RGB.27
LCD_G2: RGB.26 U1.85 | length 1534.2
  Top Layer w10: U1.85 3992.5,3631.73 4236.24,3388 ; 4236.83,3387.4 RGB.26
LCD_G3: RGB.25 U1.86 | length 1546.7
  Top Layer w10: U1.86 3995.45,3651.42 4225.43,3421.43 ; 4229.55,3417.31 4225.43,3421.43 ; 4239.43,3407.43 4225.43,3421.43 ; 4239.66,3407.2 4769,3407.2 ; 4762.8,3407.2 4769,3407.2 ; RGB.25 4769,3407.2
LCD_G4: RGB.24 U1.87 | length 1543.9
  Top Layer w10: U1.87 3539,3671.1 ; 3549.1,3671.1 3539,3671.1 ; 4241.75,3427.75 3998.39,3671.1 3539,3671.1 ; 4242.52,3426.97 RGB.24
LCD_G5: RGB.23 U1.89 | length 1543.1
  Top Layer w10: U1.89 3981.65,3710.47 4234.09,3458.02 4234.86,3458.02 4246.19,3446.69 RGB.23
LCD_G6: RGB.22 U1.91 | length 1547
  Top Layer w10: U1.91@3427.34,3751 U1.91 3964.9,3749.84 4240.72,3474.02 4241.49,3474.02 4249.51,3466 RGB.22@4854,3466
LCD_G7: RGB.21 U1.92 | length 1558.3
  Top Layer w10: U1.92 3967.85,3769.53 4247.35,3490.02 4248.11,3490.02 4252.14,3486 RGB.21@4867,3486
LCD_HSYNC: RGB.9 U1.122 | length 2382.2
  Top Layer w10: U1.122@3088,4180 3089,4181 3089,4269.76 3234.24,4415 3698.75,4415 3827,4286.75 3827,3988.75 3869.75,3946 4020.76,3946 4243.02,3723.74 RGB.9
LCD_PWM: U1.132 U9.2 | length 1033.5
  Top Layer w10: v1@2767.5,4348.5 2770.5,4348.5 2891.73,4227.27 U1.132 ; v1(3035,4836) U9.2
  Bottom Layer w10: v1@2766,4347 2766,4823 2780,4837 3030,4837 v1@3033,4840
  other v1: 2767,4347
LCD_R0: RGB.36 U1.73 | length 1542.2
  Top Layer w10: U1.73 4001.49,3395.51 4208,3189 4880,3189 RGB.36@4882,3191
LCD_R1: RGB.35 U1.74 | length 1519.1
  Top Layer w10: U1.74 4004.43,3415.2 4210.34,3209.29 RGB.35
LCD_R2: RGB.34 U1.75 | length 1519.2
  Top Layer w10: U1.75 4007.37,3434.88 4213.16,3229.09 ; 4213.25,3229 4213.16,3229.09 ; RGB.34 4213.16,3229.09
LCD_R3: RGB.33 U1.76 | length 1524.6
  Top Layer w10: U1.76 3547,3454.57 ; 3552.57,3454.57 3547,3454.57 ; RGB.33 4216.06,3248.82 4010.32,3454.57 3547,3454.57
LCD_R4: RGB.32 U1.77 | length 1530.7
  Top Layer w10: U1.77 3546,3474.25 ; 3552.25,3474.25 3546,3474.25 ; 4218.75,3268.75 4013.26,3474.25 3546,3474.25 ; 4218.89,3268.62 4749,3268.62 ; 4743.38,3268.62 4749,3268.62 ; RGB.32 4749,3268.62
LCD_R5: RGB.31 U1.78 | length 1521.9
  Top Layer w10: U1.78 3545,3493.94 ; 3547.94,3493.94 3545,3493.94 ; RGB.31 4221.71,3288.43 4016.2,3493.94 3545,3493.94
LCD_R6: RGB.30 U1.81 | length 1541.2
  Top Layer w10: U1.81 3546,3552.99 ; 3551.99,3552.99 3546,3552.99 ; RGB.30 4224.54,3308.23 3979.77,3552.99 3546,3552.99
LCD_R7: RGB.29 U1.82 | length 1537.6
  Top Layer w10: U1.82 3982.71,3572.68 4224.2,3331.2 ; 4227.4,3327.99 4737,3327.99 ; 4730.01,3327.99 4737,3327.99 ; RGB.29 4737,3327.99
LCD_VSYNC: RGB.8 U1.125 | length 2427
  Top Layer w10: U1.125@3029,4178 3029,4232.39 3227.61,4431 3705.37,4431 3843,4293.37 3843,3995.37 3876.37,3962 4027.39,3962 4245.89,3743.5 RGB.8
LDQM: U1.32 U4.15 | length 1439.9
  Top Layer w10: U4.15@1500,3725 1558.65,3725 1808,3475.65 1808,3333.9 1883.9,3258 2259,3258 2475.25,3474.25 U1.32
LED1: RLED1.2 U1.62 | length 924.1
  Top Layer w10: U1.62 3147.64,3256.36 3183,3221 3183,3124 v1@3171,3112
  Bottom Layer w10: v1(3172,3111) 3219,3158 3806,3158 3821,3173 RLED1.2@3821,3201
LED2: RLED2.2 U1.61 | length 743.3
  Top Layer w10: U1.61 3127.95,3245.05 3165,3208 3165,3167 v1@3142,3144
  Bottom Layer w10: v1(3140,3144) 3197,3201 RLED2.2@3665,3201
LVDS_1N: brg1.9 U1.65 | length 634.5
  Top Layer w10: U1.65@3207,3298 3207,3256 3218,3245 3218,3085.37 3394,2909.37 3394,2806 brg1.9
LVDS_1P: brg.10 U1.67 | length 624
  Top Layer w10: U1.67 3246.06,3258.06 3234,3246 3234,3092 3408.37,2917.63 3487.37,2917.63 3488,2917 ; 3489,2916 brg.10@3539,2866
LVDS_2N: brg1.8 U1.55 | length 695.7
  Top Layer w10: U1.55@3010,3319 3010,3159 3291,2878 3291,2809 brg1.8
LVDS_2P: brg.8 U1.56 | length 590.2
  Top Layer w10: U1.56@3030,3321 3029,3320 3029,3171 brg.8
LVDS_3N: brg1.6 U1.49 | length 692.3
  Top Layer w10: U1.49@2892,3309 2892,3220 3189,2923 3189,2809 brg1.6
LVDS_3P: brg.7 U1.50 | length 583.5
  Top Layer w10: U1.50@2911,3307 2911,3223.63 3205,2929.63 3205.37,2929.63 3240,2895 brg.7
LVDS_4N: brg.6 U1.48 | length 566.6
  Top Layer w10: U1.48 2872.05,3181.95 3137,2917 brg.6@3137,2857
LVDS_4P: brg1.5 U1.47 | length 683.2
  Top Layer w10: U1.47@2852,3328 2852,3179.37 3085,2946.37 3085,2805 brg1.5
NetAudioin_2R: Audioin.2R Audioin.3N C41.2 | length 301.6
  Top Layer w10: Audioin.2R Audioin.3N@3960.85,4943.15 ; Audioin.3N 3964.72,4754.27 C41.2@3973,4746 ; C41.2 C41.2@3973,4746 ; C41.2@3975,4744 C41.2@3973,4746
NetAudioin_4N: Audioin.4N Audioin.5T C40.2 | length 305.6
  Top Layer w10: Audioin.4N@4161.15,4943.15 Audioin.4N ; Audioin.4N@4161.57,4943 4161.57,4748.43 C40.2@4170,4740 ; Audioin.4N@4161.73,4943 Audioin.4N ; Audioin.5T Audioin.4N
NetAudioout_2R: Audioout.2R Audioout.3N C61.2 R32.2 | length 406.7
  Top Layer w10: Audioout.2R@4365.85,4943.15 Audioout.2R Audioout.3N ; Audioout.3N@4458,4936 4460,4934 C61.2
  Bottom Layer w10: R32.2 4447.37,4719.37 C61.2@4457,4729
NetAudioout_4N: Audioout.4N Audioout.5T C62.2 R33.1 | length 410.5
  Top Layer w10: C62.2@4661.57,4741.43 Audioout.4N Audioout.5T Audioout.5T@4767.15,4943.15
  Bottom Layer w10: C62.2@4677,4719 4677.37,4719.37 R33.1
NetC13_2: C13.2 R1.1 U1.144 | length 46.6
  Top Layer w20: R1.1 2628,4200 2646,4200
  other v1: 2613,4187 2613,4215
NetC14_1: C14.1 R4.1 U1.108 | length 66.6
  Top Layer w20: 3460,4094 R4.1
  other v1: 3444,4143 3475,4143
NetC15_2: C15.2 R3.2 U1.72 | length 149.3
  Bottom Layer w10: C15.2@3387.81,3312.82 C15.2
  Bottom Layer w20: R3.2@3321,3417 3353,3385 3353,3350 C15.2@3389,3314
  other v1: 3354,3356
NetC16_2: C16.2 R2.2 U1.36 | length 148.4
  Bottom Layer w10: C16.2 2580,3352 2647,3419 R2.2@2688,3419
  other v1: 2615,3388
NetC36_1: C36.1 R33.2 | length 103.5
  Bottom Layer w10: C36.1 4779.37,4638.37 R33.2@4783,4642
NetC37_2: C37.2 R10.1 U1.96 | length 768.3
  Top Layer w10: U1.96 v1@3754,3848.27
  Bottom Layer w10: 3521,3732 3715,3732 3726,3743 3726,3840 ; 3726,3841 3735,3850 v1(3753,3850)
  Bottom Layer w20: C37.2 R10.1 3520.63,3782.63 R10.1@3521,3783
NetC38_1: C38.1 R11.2 U1.97 | length 607.1
  Top Layer w10: U1.97 3673.95,3867.95 v1@3696,3890
  Bottom Layer w10: R11.2@3519,3920 3519,3892 3534,3877 3680,3877 v1(3692,3889)
  Bottom Layer w20: C38.1 3537,4003.63 3537,3932 R11.2@3522,3917
NetC40_1: C40.1 R14.1 R15.2 R23.2 | length 184.7
  Top Layer w10: R23.2@4248,4659 4255.37,4666.37 C40.1
  Bottom Layer w10: R15.2@4255.37,4651.37 R14.1
  other v1: 4270,4759
NetC41_1: C41.1 R21.2 R22.1 R24.2 | length 181.2
  Top Layer w10: C41.1 3890.63,4655.37 R24.2@3892,4654
  Bottom Layer w10: R21.2@3890.63,4657.37 R22.1
  other v1: 3877,4758
NetC44_2: C44.2 U6.6 | length 113.6
  Top Layer w10: v1@4199.87,4342.13 U6.6
  Bottom Layer w10: C44.2@4190,4293 4200,4303 v1(4200,4345)
NetC60_2: C60.2 R32.1 | length 100.2
  Bottom Layer w10: C60.2 4360.63,4639.63 R32.1@4361,4640
NetC61_1: C61.1 R29.2 U7.1 | length 334.3
  Top Layer w10: R29.2@4361,4392 4361,4414 4373,4426 4462,4426 U7.1 ; C61.1 4460,4430 U7.1@4462,4428
NetC62_1: C62.1 R30.2 U7.7 | length 428.2
  Top Layer w10: U7.7 4656.49,4378 4715,4378 R30.2@4769,4378 ; C62.1@4679,4631 4745,4631 4760,4616 R30.2
NetCLK_3: CLK.3 U1.127 | length 207.8
  Top Layer w10: U1.127 CLK.3@2990.16,4374
NetD1_2: D1.2 L3.2 U9.6
NetDONE_2: DONE.2 U1.109 | length 127.8
  Top Layer w10: U1.109@3345,4203 v1@3371,4203
  Bottom Layer w10: DONE.2@3346,4119 3346,4199 3348,4201 v1(3367,4201)
NetINIT_1: INIT.1 U1.110 | length 109.6
  Top Layer w10: v1@3273,4105 v1(3274,4105) 3319,4105 3324.8,4110.8 U1.110
NetJp_2: Jp.2 R16.1 | length 286.1
  Bottom Layer w10: Jp.2 3389,4781 3389,4954 3399,4964 R16.1@3440,4964
NetLED1_2: LED1.2 RLED1.1 | length 79.8
  Top Layer w10: LED1.2@3820,3281 3821,3282 v1(3821,3321)
  Bottom Layer w10: RLED1.1@3820,3282 3821,3283 v1(3821,3321)
NetLED2_2: LED2.2 RLED2.1 | length 82.8
  Top Layer w10: LED2.2@3660,3279 LED2.2 v1(3660,3324)
  Bottom Layer w10: RLED2.1@3658,3287 3660,3289 v1(3660,3324)
NetPLED_1: PLED.1 RLED.1
  other v1: 2325,4865 2355,4865
NetR9_1: R9.1 U1.119 | length 109.3
  Top Layer w10: v1@3147.64,4104.36 U1.119
  Bottom Layer w10: R9.1 3140,4097 v1@3147,4104
  other v1: 3147,4103
NetR13_2: R13.2 U5.6 | length 230.8
  Bottom Layer w10: R13.2@3224,5139 3397,5139 3405,5131 U5.6
NetR25_2: R25.2 R29.1 U7.2 | length 229.2
  Top Layer w10: v1(4320,4311) R29.1@4368,4311 ; R29.1@4355,4330 4379,4330 4396,4347 4396,4363 4409,4376 U7.2
  Bottom Layer w10: v1@4319,4312 4357,4312 R25.2@4360,4315
NetR30_1: R30.1 R31.2 U7.6 | length 203.3
  Top Layer w10: U7.6 v1(4805,4326) v1@4806,4326
  Bottom Layer w10: R31.2@4754,4324 4756,4326 v1(4805,4326)
NetU5_13: U5.13 USBhost.3 | length 409.3
  Top Layer w10: v1@3506,5242 3482,5218 3482,4895 USBhost.3@3519,4858
  other v1: 3506,5241
NetU6_5: U6.5 U7.3 U7.5 | length 945.4
  Top Layer w10: U6.5 4001.63,4399.63 3992,4390 3992,4328 4002,4318 4274,4318 4284,4308 4284,4252 4293,4243 4392,4243 4402,4253 4402,4313 4412,4323 U7.3@4459,4323 ; U7.3@4466,4328 4546,4328 4598,4276 U7.5
RAS: U1.35 U4.18 | length 1419.8
  Top Layer w10: U4.18@1496,3630 1585.76,3630 1760,3455.76 1760,3314.02 1864.02,3210 2278.88,3210 2484.08,3415.2 2499,3415.2 U1.35
SD_CLK: R26.1 SD.5 U1.139 | length 1508.9
  Top Layer w10: v1@1729,4733 1729.23,4733.23 SD.5 1840.77,4733.23 1917,4657 1917,4393.25 1963.94,4346.31 2639.8,4346.31 2754,4232.12 U1.139@2754,4158
  Bottom Layer w10: R26.1@1685,4729 1689,4733 v1(1731,4733)
SD_CS: R28.1 SD.2 U1.141 | length 1417.3
  Top Layer w10: v1@1731,4603.31 SD.2 ; SD.2@1779,4603 1846,4603 1885,4564 1885,4380 1950.72,4314.28 2626.59,4314.28 2714.57,4226.3 U1.141
  Bottom Layer w10: R28.1 1721,4540 1731,4550 v1(1731,4603)
SD_MISO: SD.7 U1.138 | length 1480.4
  Top Layer w10: SD.7 1847.16,4819.84 1933,4734 1933,4399.88 1970.57,4362.31 2646.43,4362.31 2773,4235.75 U1.138@2773,4186
SD_MOSI: R27.1 SD.3 U1.140 | length 1409.7
  Top Layer w10: v1@1731,4646.61 SD.3 ; SD.3@1777,4646 1844.63,4646 1901,4589.63 1901,4386.63 1957.31,4330.31 2633.18,4330.31 2731.47,4232.02 2731.47,4168.96 U1.140
  Bottom Layer w10: R27.1@1684,4644 1686,4646 v1(1732,4646)
UDP: R16.2 U5.12 USBhost.2 | length 447.8
  Bottom Layer w10: USBhost.2@3439,4859 3482,4902 3482,4960 ; U5.12@3454,5240 3482,5212 3482,4960 ; R16.2 3482,4960
UDQM: U1.19 U4.39 | length 666.2
  Top Layer w10: U4.39@1923,3693 2092,3693 2129.16,3730.16 U1.19
USB_MISO: U1.107 U5.4 | length 1238.2
  Top Layer w10: U1.107 3504.8,4064.8 3531,4091 3531,4294 v1@3532,4295 ; v1(3506,5027) 3517,5027 3658,4886 3658,4819 3634.25,4795.25 3634,4795.25 3583,4744.25 3583,4500.7 3570,4487.7 3570,4486 v1@3560,4476
  Bottom Layer w10: v1@3503,5025 3505,5027 U5.4 ; v1(3531,4295) 3531,4452 v1@3559,4480
  other v1: 3559,4479
USB_MOSI: U1.106 U5.3 | length 1247.8
  Top Layer w10: U1.106 3518.12,4045.12 3562,4089 v1@3562,4291 ; v1(3555,5026) 3555,5014 3674,4895 3674,4812.37 3640.88,4779.25 3640.63,4779.25 3599,4737.63 3599,4492.37 3591,4484.37 3591,4481 v1@3588,4478
  Bottom Layer w10: v1@3552,5025 3555,5028 U5.3 ; v1(3563,4294) 3563,4451 v1(3591,4479) v1@3592,4480
USB_SCK: U1.111 U5.5 | length 1000.9
  Top Layer w10: U1.111 3305.12,4234.12 v1@3367.5,4296.5 ; v1@3381,4480 3389,4488 3389,4993 3423,5027 v1(3456,5027)
  Bottom Layer w10: v1(3366,4295) 3380,4309 ; 3381,4310 v1@3381,4478 ; v1@3455,5025 U5.5
  other v1: 3382,4479
USB_SS: U1.105 U5.2 | length 1275.8
  Top Layer w10: U1.105 3542.43,4025.43 3593,4076 v1@3593,4294 ; v1(3606,5027) 3606,4986 3690,4902 3690,4805.75 3647.51,4763.25 3647.25,4763.25 3615,4731 3615,4499.75 3622,4492.75 v1(3622,4479) v1@3621,4478
  Bottom Layer w10: v1(3594,4294) 3594,4451 v1@3620,4477 ; v1@3604,5027 3605,5028 U5.2
VLED+: C52.1 D1.1 RGB.39 U9.5 | length 4192.1
  Top Layer w10: RGB.39 4929.24,3130.24 v1@4965,3166
  Bottom Layer w10: v1(3077,5195) 3077,5315 3118,5356 4728,5356 4763,5321 4763,5207 4963,5007 v1(4963,3169)
  other v1: 3077,5164
VLED-: R17.2 RGB.40 U9.4 | length 4800.5
  Top Layer w10: RGB.40 4948.43,3110.43 ; 4949,3111 4948.43,3110.43 ; v1@4974,3127 v1(4973,3126) 4957.43,3110.43 4948.43,3110.43
  Bottom Layer w10: v1(3072,5011) 3072,5042 3060,5054 2930,5054 2915,5069 2915,5342 2947,5374 4751,5374 4788,5337 4788,5238 4994,5032 4994,3147 v1(4973,3126)
  other v1: 3072,4986
WE: U1.33 U4.16 | length 1429
  Top Layer w10: U4.16@1504,3696 1508,3692 1569.02,3692 1792,3469.02 1792,3327.27 1877.27,3242 2265.63,3242 2478.19,3454.57 U1.33
pads on no net: Audioin.0 Audioin.1 Audioin.2 Audioout.0 Audioout.1 Audioout.2 brg1.1 brg1.2 brg1.3 brg1.4 brg1.7 brg1.10 brg.1 brg.2 brg.3 brg.4 brg.5 brg.9 RGB.0 RGB.1 RGB.2 RGB.3 RGB.4 RGB.6 SD.0 SD.1 SD.8 SD.9 U1.128 U1.133 U4.40 U5.1 U5.7 U5.8 U5.9 U5.10 U5.11 USB. USB.2 USB.3 USB.MH1 USB.MH2 USBhost.5
copper on no net:
  other v2: 1295,2710 4920,2710 1295,5280 4920,5280

## Polygon pours and split planes (outlines as drawn)
GND on Top Layer "Top Layer-No Net" (solid, remove dead copper, pour order 1000): 1135,2580 5081,2580 5081,5425 1135,5425 1130,5420 1140,5410 1140,2580
GND on Bottom Layer "Top Layer-No Net" (solid, remove dead copper, pour order 1001): 1138,2571 5076,2571 5082,2577 5082,5435 1151,5435 1138,5422

## Keep-outs
Keep-Out Layer:
  lines w13: 1146,2678 1146,5344 1224,5422 4999,5422 5066,5355 5066,2675 4982,2591 1233,2591 1146,2678

## Other copper
Top Layer:
  rectangle net 2.5V: 2430,4802 2509,4850
  rectangle net 5V: 4571,3903 4865,3933
  rectangle net 5V: 4840,3905 4866,5058
  rectangle net 5V: 4652,5025 4864,5058
  rectangle net 5V: 4650,5025 4689,5379
  rectangle net 3.3V: 3316,3882 3348,3917
  rectangle net 3.3V: 3308,3507 3334,3895
  rectangle net 3.3V: 3316,3914 3364,4053
  rectangle net 3.3V: 2655,4039 3364,4085
  rectangle net 3.3V: 2655,3490 2717,4095
  rectangle net 3.3VA: 4480,3871 4553,3924
  rectangle net 3.3VA: 4541,3871 4561,4145
  rectangle net 3.3VOUT: 2117,4832 2152,5137
  rectangle net 3.3VOUT: 2122,4831 2239,5011
  rectangle net 2.5VOUT: 2524,4834 2557,5138
  rectangle net 2.5VOUT: 2525,4833 2646,5010
  rectangle net 5V: 1447,5336 2050,5378
  rectangle net 5V: 1800,5097 1813,5353
  rectangle net 5V: 1445,5318 1516,5379
  rectangle net 5V: 2010,5157 2051,5379
  rectangle net 5V: 2013,5156 2782,5202
  rectangle net 5V: 2205,5036 2245,5201
  rectangle net 5V: 2611,5034 2650,5199
  rectangle net 5V: 2722,4862 2801,5201
  rectangle net 5V: 2722,4858 3008,4879
  rectangle net NetD1_2: 2861,4999 2899,5212
  rectangle net VLED+: 3022,4982 3046,5213
  rectangle net NetD1_2: 2926,4970 3009,5023
  rectangle net 5V: 2730,5114 2793,5382
  rectangle net 5V: 2732,5343 4686,5382
Bottom Layer:
  rectangle net GND: 3423,3926 3478,4013
  rectangle net GND: 3443,3950 3511,3988
  rectangle net 2.5V: 2430,4802 2506,4907
  rectangle net 3.3V: 2427,4041 2715,4095
  rectangle net 3.3V: 2426,4042 2467,4706
  rectangle net 3.3V: 1983,3824 2033,4017
  rectangle net 3.3V: 1579,3804 2034,3844
  rectangle net 3.3V: 1575,3312 1625,4720
  rectangle net 3.3V: 1598,4670 2466,4708
  rectangle net 3.3V: 2036,4675 2084,4900
  rectangle net 5V: 4575,3877 4722,3931
  rectangle net 3.3VA: 4375,3874 4524,3933
  rectangle net 3.3VOUT: 1966,5086 2156,5148
  rectangle net 5V: 2167,5090 2321,5146
  rectangle net 2.5VOUT: 2377,5089 2556,5147
  rectangle net 5V: 2574,5090 2730,5147
  rectangle net 3.3VOUT: 2131,5116 2156,5332
  rectangle net 2.5VOUT: 2534,5088 2557,5353
  rectangle net 3.3VOUT: 2070,5260 2201,5364
  rectangle net 2.5VOUT: 2476,5259 2606,5366

## Text inside footprints (layer, text, board x,y; h text height)
C61: Top Overlay "+" at 4440,4570 h48 r270
C62: Top Overlay "+" at 4660,4570 h48 r270